# EAGLE board NES (EAGLE 9.6.2)
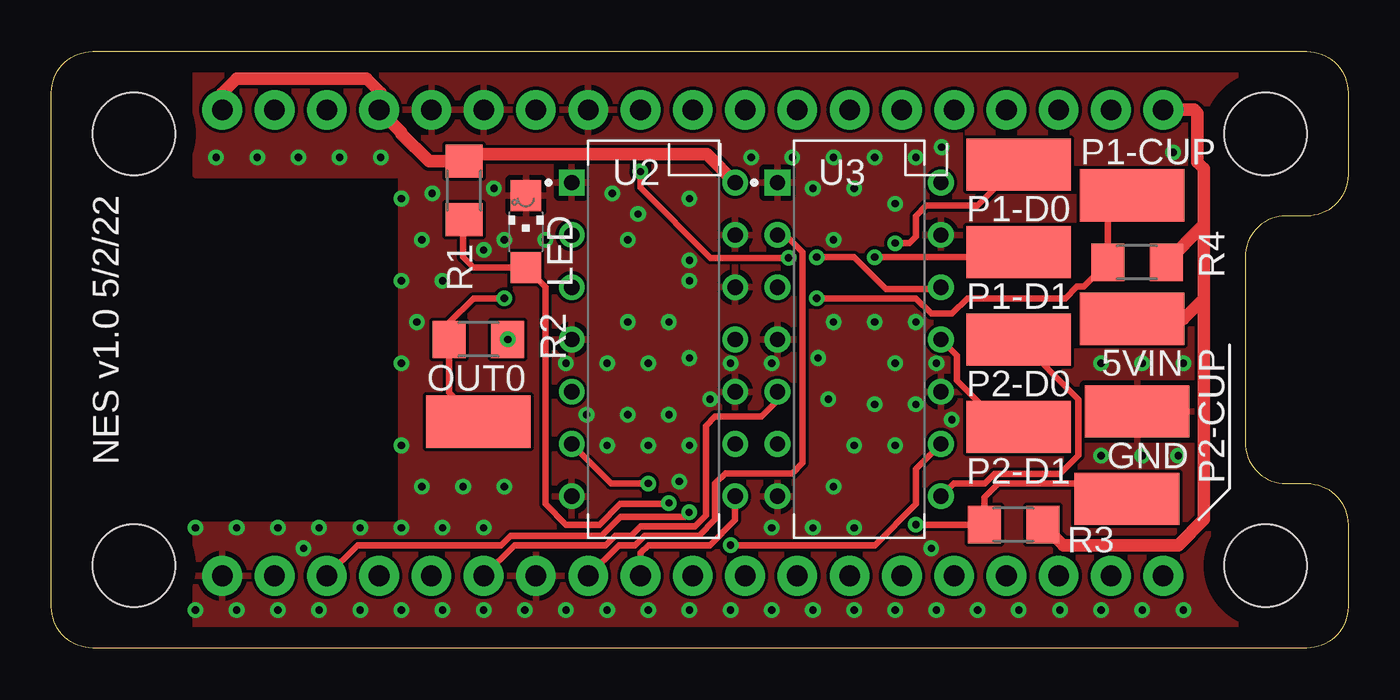
[diagram p0: board, top side]
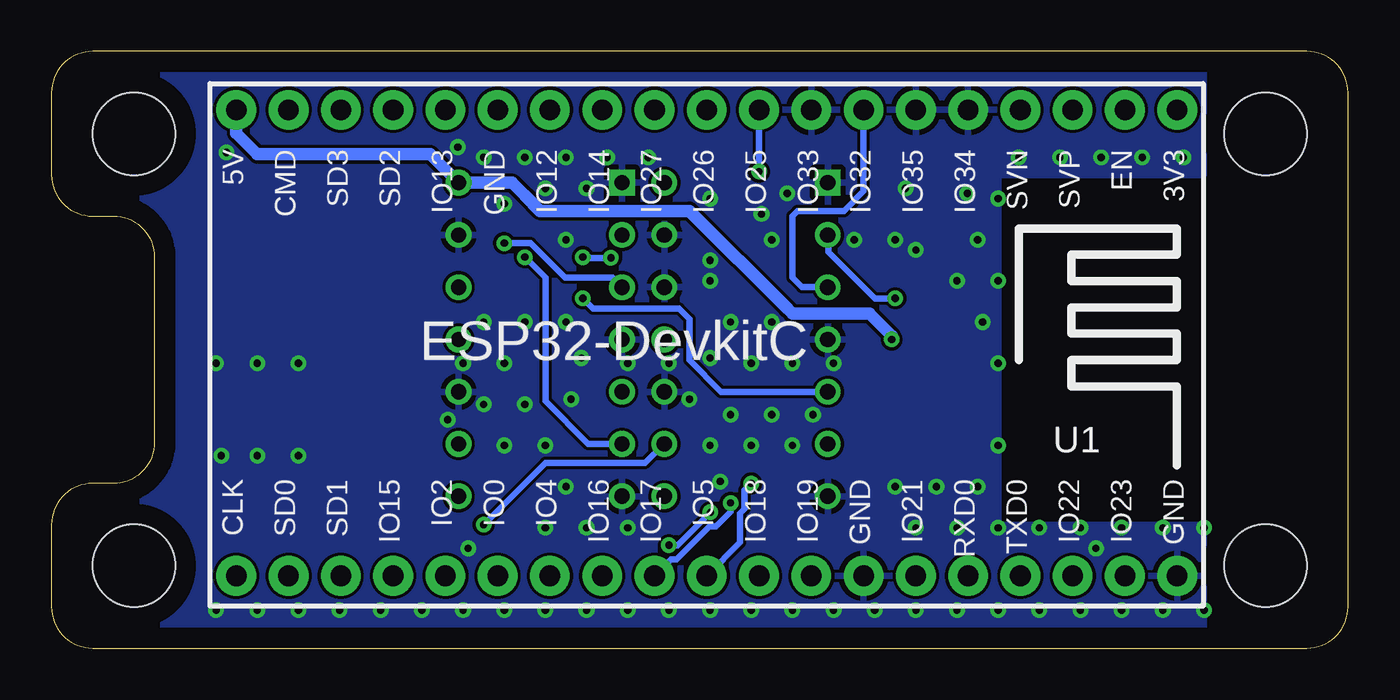
[diagram p1: board, bottom side, seen from below]

Size 63 x 29 mm. Coordinates in mm from the lower left corner, seen from the top.
Outline: 0,2 0,27 arc-90 2,29 61,29 arc-90 63,27 63,23 arc-90 61,21 60,21 arc90 58,19 58,10 arc90 60,8 61,8 arc-90 63,6 63,2 arc-90 61,0 2,0 arc-90 0,2
Copper layers (1*16): Top 0.035mm / dielectric 1.5mm / Bottom 0.035mm
Design rules "default": minimum track width 6mil, minimum drill 0.35mm, track to track 6mil, track to pad 6mil, pad to pad 6mil, via to via 6mil, smd to smd 6mil, copper to edge 40mil, drill to drill 6mil, minimum pad ring 10mil, minimum via ring 8mil, stop-mask expansion 4mil, vias tented up to drill 0.5mm, thermal gap 10mil
Holes 4 mm at 4,4 4,25 59,25 59,4

## Footprints (pad centres in the part's own frame; a part is rotated, then mirrored left to right if it is on the bottom)
SMD2,54-5,08 = smd 2.54 x 5.08: 1 0,0
CHIPLED_1206 = smd 1.5 x 1.5: A 0,-1.75; C 0,1.75
R1206 = smd 1.6 x 1.803: 1 -1.422,0; 2 1.422,0
ESP32-DEVKITC = drill 1 pad 1.93: 1 -22.87,-11.42; 2 -20.33,-11.42; 3 -17.79,-11.42; 4 -15.25,-11.42; 5 -12.71,-11.42; 6 -10.17,-11.42; 7 -7.63,-11.42; 8 -5.09,-11.42; 9 -2.55,-11.42; 10 -0.01,-11.42; 11 2.53,-11.42; 12 5.07,-11.42; 13 7.61,-11.42; 14 10.15,-11.42; 15 12.69,-11.42; 16 15.23,-11.42; 17 17.77,-11.42; 18 20.31,-11.42; 19 22.85,-11.42; 20 22.85,11.23; 21 20.31,11.23; 22 17.77,11.23; 23 15.23,11.23; 24 12.69,11.23; 25 10.15,11.23; 26 7.61,11.23; 27 5.07,11.23; 28 2.53,11.23; 29 -0.01,11.23; 30 -2.55,11.23; 31 -5.09,11.23; 32 -7.63,11.23; 33 -10.17,11.23; 34 -12.71,11.23; 35 -15.25,11.23; 36 -17.79,11.23; 37 -20.33,11.23; 38 -22.87,11.23
DIP794W45P254L1969H508Q14 = drill 0.74 pad 1.14 square: 1 -3.97,7.62 | drill 0.74 pad 1.14: 2 -3.97,5.08; 3 -3.97,2.54; 4 -3.97,0; 5 -3.97,-2.54; 6 -3.97,-5.08; 7 -3.97,-7.62; 8 3.97,-7.62; 9 3.97,-5.08; 10 3.97,-2.54; 11 3.97,0; 12 3.97,2.54; 13 3.97,5.08; 14 3.97,7.62

## Placement (x,y rotation side)
5VIN  [SMD2,54-5,08]  52.5,16 90 top
GND  [SMD2,54-5,08]  52.75,11.5 90 top
LED  [CHIPLED_1206]  23.05,20.24 0 top
OUT0  [SMD2,54-5,08]  20.75,11 270 top
P1-CUP  [SMD2,54-5,08]  52.5,22 270 top
P1-D0  [SMD2,54-5,08]  47,23.5 90 top
P1-D1  [SMD2,54-5,08]  47,19.25 90 top
P2-CUP  [SMD2,54-5,08]  52.25,7.25 270 top
P2-D0  [SMD2,54-5,08]  47,15 90 top
P2-D1  [SMD2,54-5,08]  47,10.75 90 top
R1  84  [R1206]  20.05,22.24 270 top
R2  3.6K  [R1206]  20.75,15 0 top
R3  3.6K  [R1206]  46.75,6 0 top
R4  3.6K  [R1206]  52.75,18.75 0 top
U1  ESP32DEVKITC  [ESP32-DEVKITC]  31.17,14.74 180 bottom
U2  SN74AHCT125N  [DIP794W45P254L1969H508Q14]  29.25,15 0 top
U3  SN74AHCT125N  [DIP794W45P254L1969H508Q14]  39.25,15 0 top

## Library data of the parts
5VIN GND OUT0 P1-CUP P1-D0 P1-D1 P2-CUP P2-D0 P2-D1 = wirepad
LED R1-R4 = adafruit
U1 = ESP32-DEVKITC
U2 U3 = SN74AHCT125N; AVAILABILITY: In Stock; DESCRIPTION: Quadruple Bus Buffer Gates With 3-State Outputs 14-PDIP -40 to 125; MF: Texas Instruments; MP: SN74AHCT125N; PACKAGE: PDIP-14 Texas Instruments; PRICE: None; PURCHASE-URL: https://pricing.snapeda.com/search/part/SN74AHCT125N/?ref=eda

## Nets
3V3IN: R1.1 U1.1 U1.4 U2.14
5VIN: 5VIN.1 R2.2 R3.2 R4.2 U1.19 U3.14
GND: GND.1 LED.C U1.5 U1.6 U1.8 U1.32 U1.38 U2.1 U2.4 U2.7 U2.10 U2.12 U2.13 U3.1 U3.4 U3.7 U3.10 U3.13
IO5: U1.29 U2.6
IO18: U1.30 U2.8
IO19: U1.31 U3.2
IO21: U1.33 U3.5
IO22: U1.36 U3.9
IO25: U1.9 U3.12
IO32: U1.7 U2.3
LED: LED.A R1.2 U1.28
OUT0: OUT0.1 R2.1 U2.2
P1-CUP: P1-CUP.1 R4.1 U2.5
P1-D0: P1-D0.1 U3.3
P1-D1: P1-D1.1 U3.6
P2-CUP: P2-CUP.1 R3.1 U2.9
P2-D0: P2-D0.1 U3.8
P2-D1: P2-D1.1 U3.11

## Tracks (layer width: path | path; a pad name or v marks a point on that pad's centre or on a via)
3V3IN
  Top 0.61: U1.1 8.3,26.98 9,27.68 15.32,27.68 16,27 16,26.24 U1.4 17,25.08 17,25 18.34,23.66 R1.1 20.39,24 31.84,24 U2.14
5VIN  (via drill 0.35)
  Top 0.61: U1.19 55.52,26.16 55.68,26 55.68,23.62 56,23.3 56,20.58 | 56,20.58 R4.2 | R3.2 49.17,5 54.75,5 56,6.25 56,17 | 56,20.58 56,17 | 5VIN.1 55,16 56,17
  Bottom 0.61: U1.19 54.02,25.02 53,24 44.6,24 U3.14 40.62,22.62 40,22 39.25,21.25 32,21.25 27.25,16.5 27,16.25 23.25,16.25 22.17,15.17 R2.2
  other vias: 22.17,15
GND  (via drill 0.35)
  other vias: 7,1.85 7,5.85 9,1.85 9,5.85 8,23.85 11,1.85 11,5.85 10,23.85 13,1.85 12.25,4.85 13,5.85 12,23.85 15,1.85 15,5.85 14,23.85 17,1.85 17,5.85 17,9.85 17,13.85 17,17.85 17,21.85 16,23.85 19,1.85 19,5.85 18,7.85 17.75,15.85 19,17.85 18,19.85 18.5,22.1 21,1.85 21,5.85 20,7.85 28.5,21.1 21,19.35 21.5,22.35 23,1.85 22,7.85 22,19.85 25,1.85 25,13.85 24,19.85 27,1.85 27,9.85 26,11.35 27,13.85 27.25,22.1 29,1.85 29,9.85 28,11.35 29,13.85 28,15.85 28,19.85 31,1.85 30.5,8.1 31,9.85 30,11.35 31,14.1 30,15.85 31,17.85 31,21.85 33,1.85 32,12.1 33,13.85 31,18.85 35,1.85 35,5.85 35,13.85 34,23.85 37,1.85 37,5.85 37.25,14.1 37,22.35 36,23.85 39,1.85 39,5.85 38,7.85 39,9.85 37.75,12.1 38,15.85 38,19.85 39,22.35 38,23.85 41,1.85 42.75,4.85 41,9.85 40,11.85 41,13.85 40,15.85 41,21.6 40,23.85 43,1.85 42,11.85 43,13.85 42,15.85 42,23.85 45,1.85 43.75,11.1 43.25,24.35 47,1.85 49,1.85 51,1.85 51,9.35 51,13.85 53,1.85 53,9.35 53,13.85 55,1.85 54.75,9.35 55,13.85 54.5,24.1
  pour Top: 7,29 7,23 17,23 17,6 7,6 7,0 63,0 63,29
  pour Bottom: 7,0 63,0 63,29 7,29 7,23 17,23 17,6 7,6
IO5  (via drill 0.35)
  Top 0.305: v29,8 27.2,8 U2.6
  Bottom 0.305: U1.29 29.54,5.13 29.54,6.55 29.32,6.77 29.32,7.68 v29,8
IO18
  Top 0.305: U1.30 28.62,4.62 29,5 32,5 33.22,6.22 U2.8
IO19
  Top 0.305: U1.31 27.57,5 28.35,5 28.81,5.46 31.46,5.46 32.25,6.25 32.25,8 32.75,8.5 36,8.5 36.5,9 36.5,19.25 35.67,20.08 U3.2
IO21
  Top 0.305: U1.33 22.49,5 26.92,5 27.38,5.46 28.16,5.46 28.62,5.91 31.27,5.91 31.79,6.44 31.79,10.79 32.25,11.25 34.5,11.25 35.28,12.03 U3.5
IO22  (via drill 0.35)
  Top 0.305: U1.36 14.87,5 21.84,5 22.3,5.46 26.73,5.46 27.65,6.37 30.76,6.37 v30.98,6.6 | v33,5 40,5 42,7 42,8.7 U3.9
  Bottom 0.305: v30.98,6.6 32.58,5 v33,5
IO25  (via drill 0.35)
  Top 0.305: U3.12 43.14,17.46 40.54,17.46 39,19 v37.18,19 | v35.82,18.97 32.03,18.97 28.62,22.38 v28.62,23.16
  Bottom 0.305: v37.18,19 37.15,18.97 v35.82,18.97 | U1.9 v28.62,23.16
IO32
  Bottom 0.305: U1.7 23.54,22.21 24.5,21.25 26.75,21.25 27,21 27,18 26.54,17.54 U2.3
LED  (via drill 0.35)
  Top 0.305: v30,7.05 29.95,7 27.63,7 26.63,6 25,6 24,7 24,17.54 LED.A 20.51,18.49 20,19 20,20.77 R1.2
  Bottom 0.305: U1.28 32.89,4.32 32.62,4.32 31.02,5.91 30.7,5.91 30,6.62 v30,7.05
OUT0  (via drill 0.35)
  Top 0.305: v22,17 20.5,17 19.33,15.83 R2.1 19.33,12.42 OUT0.1
  Bottom 0.305: U2.2 25.25,20.05 25.25,19.25 23,17 v22,17
P1-CUP  (via drill 0.35)
  Top 0.305: P1-CUP.1 51.33,20.83 R4.1 50.15,17.57 49.83,17.57 49.26,17 44.5,17 43.75,16.25 42.75,16.25 42,17 v37.18,17
  Bottom 0.305: v37.18,17 36.68,16.5 32.5,16.5 32,16 32,14 30.46,12.46 U2.5
P1-D0  (via drill 0.35)
  Top 0.305: v41,19.68 41.68,19.68 42,20 42,21 42.5,21.5 45,21.5 P1-D0.1
  Bottom 0.305: v41,19.68 39.72,19.68 38.03,18 35.74,18 U3.3
P1-D1  (via drill 0.35)
  Top 0.305: v40,19 46.75,19 P1-D1.1
  Bottom 0.305: U3.6 36.92,9.92 39,12 39,18 v40,19
P2-CUP  (via drill 0.35)
  Top 0.305: v42,6 R3.1 45.33,7.33 46,8 51.5,8 P2-CUP.1
  Bottom 0.305: U2.9 34.15,8.99 35.66,8.99 35.67,9 39,9 v42,6
P2-D0
  Top 0.305: U3.8 43.84,8 45.35,8 45.81,8.46 49,8.46 49.91,9.36 49.91,12.1 P2-D0.1
P2-D1
  Top 0.305: U3.11 44,14.22 44,13 46.25,10.75 P2-D1.1

## Text on the board
tNames: NES v1.0 5/2/22